# Altium PCB IG-3.PCBDOC (part 3 of 3)
Units mil, origin at the board's own origin, x right, y up, seen from the top; angles counter-clockwise.
Board outline 1917.72 x 964.57 mil, 4 copper layers (Top, GND Plane, Mid1-Ver, Bottom), stack 61.6 mil thick; 39 components, 57 nets, 358 pads, 277 vias.
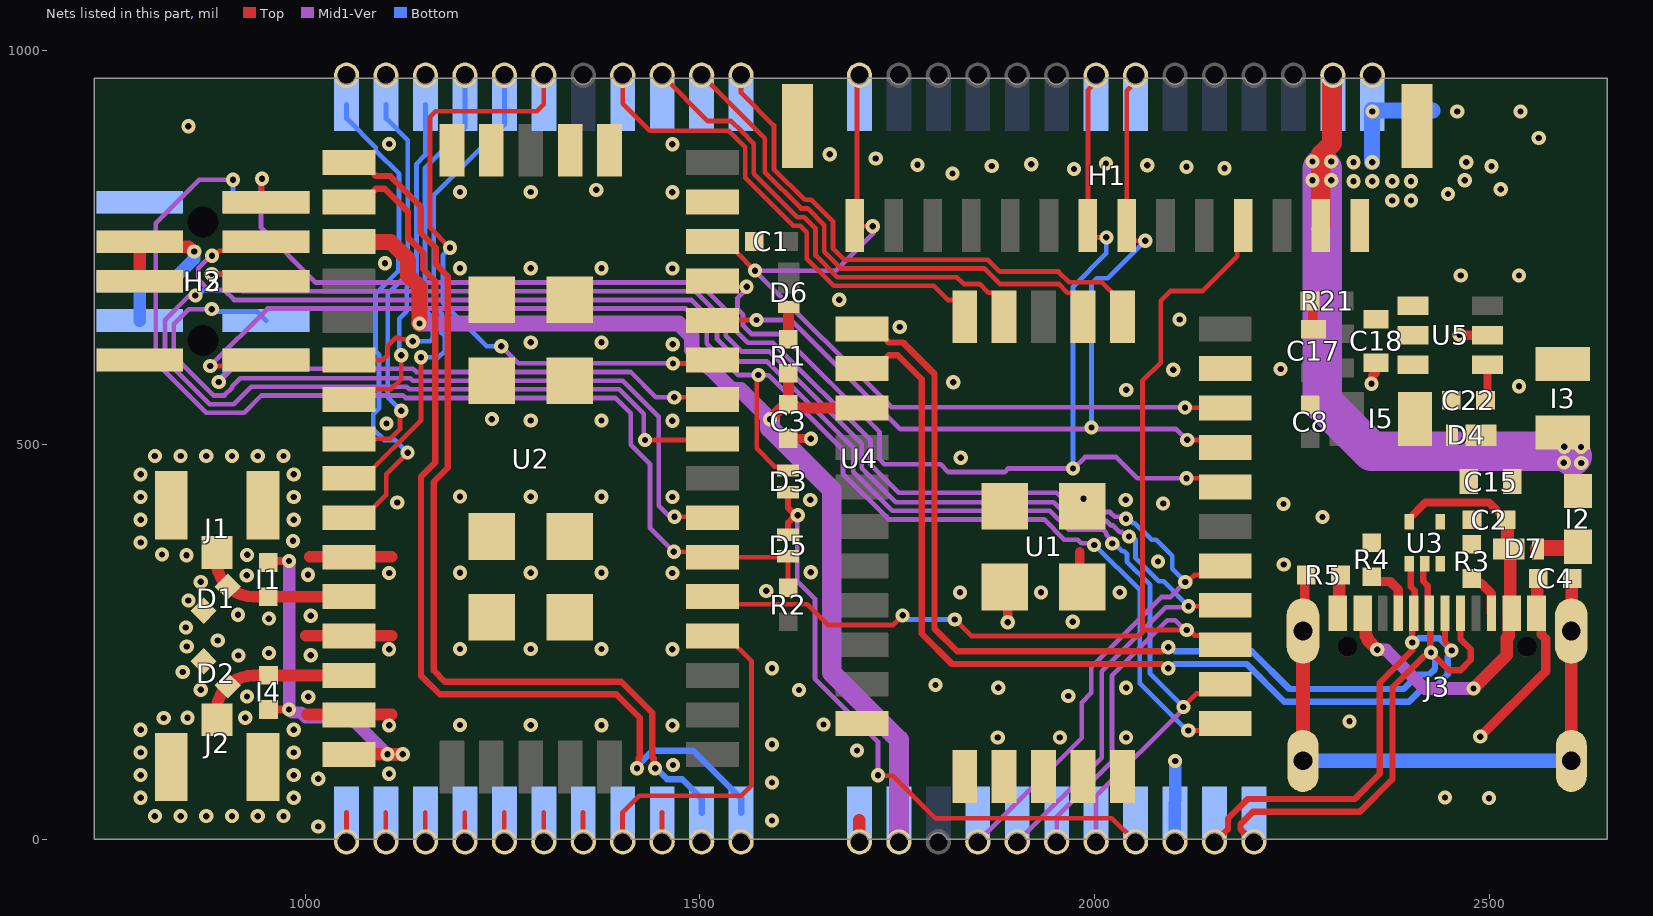
[diagram p4: the nets of this part, all layers, seen from the top]

## Via types
v1: diameter 18, hole 8, Top to Bottom, 277 vias

## Nets (pads, with @x,y where several pads share a name; then routed paths per layer and width w, separated by ;. In a path a pad name is that pad's centre, name@x,y a point inside that pad or via, vN(x,y) a via of type N, cw(c..) or ccw(c..) an arc to the next point about the centre after c; other vN are vias at no path point) (continued)
G11/SWDIO: H2.2 U1.16 U4.18 | length 1998.9
  Top w6: v1(944.88,837.01) 944.88,812.28 H2.2@950.08,807.09 ; v1(2115.07,325.93) 2117.78,325.93 2126.44,334.58 2160.93,334.58 U1.16@2172.68,346.33
  Mid1-Ver w6: v1(944.88,837.01) 943.49,835.62 943.49,775.16 1013.26,705.38 1498.29,705.38 1543.59,660.08 1543.59,646.28 1560.76,629.11 1592.44,629.11 1716.16,505.39 1716.16,474.66 1751.92,438.89 1951.82,438.89 1976.19,414.53 2019.59,414.53 2025.68,408.44 2037.56,408.44 v1(2039.86,406.15) ; U4.18@1852.09,-3.54 1983.78,128.15 1983.78,173.08 1996.03,185.33 1996.03,217.86 2084.88,306.71 2095.85,306.71 v1(2115.07,325.93)
  Bottom w6: v1(2039.86,406.15) 2043.11,406.15 2048.79,400.46 2051.03,400.46 2072.24,379.26 2078.39,379.26 2098.42,359.24 2098.42,342.59 v1(2115.07,325.93)
G12/SWO: H2.6 U1.15 U4.19 | length 1976.4
  Top w6: v1(881.08,716.35) 940.81,716.35 H2.6@950.08,707.09 ; v1(2119.1,295.21) 2171.56,295.21 U1.15@2172.68,296.33
  Mid1-Ver w6: v1(881.08,716.35) 897.43,716.35 919.39,694.38 1493.73,694.38 1532.59,655.52 1532.59,638.06 1552.55,618.11 1587.88,618.11 1665.12,540.87 1705.16,500.83 1705.16,470.1 1748.18,427.08 1948.08,427.08 1971.63,403.53 2015.03,403.53 2021.12,397.44 2023.74,397.44 2032.04,389.15 2034.75,389.15 2040.43,383.46 v1(2043.68,383.46) ; U4.19@1902.09,-3.54 2009.03,103.4 2009.03,212.48 2090.26,293.71 2117.6,293.71 v1(2119.1,295.21)
  Bottom w6: 2052.08,379.95 2052.08,356.07 2081.37,326.79 2087.52,326.79 v1(2119.1,295.21)
G14/SWCLK: H2.4 U1.13 U4.21 | length 1979.5
  Top w6: v1(881.46,739.35) 884.71,739.35 890.94,745.59 938.58,745.59 H2.4@950.08,757.09 ; v1(2112.65,167.51) 2112.65,167.84 2129.39,184.58 2160.93,184.58 U1.13@2172.68,196.33
  Mid1-Ver w6: v1(881.46,739.35) 880.03,739.35 864.08,723.39 864.08,709.31 877.04,696.35 896.57,696.35 909.53,683.38 1489.18,683.38 1521.59,650.97 1521.59,633.5 1549.91,605.19 1585.24,605.19 1694.16,496.28 1694.16,465.54 1743.62,416.08 1943.52,416.08 1967.07,392.53 2010.48,392.53 2014.72,388.29 2014.72,385.67 2022.39,378 v1(2022.39,374.75) ; U4.21@2001.86,-3.54 2001.86,54.01 2112.65,164.8 v1(2112.65,167.51)
  Bottom w6: v1(2022.39,374.75) 2025.64,374.75 2035.43,364.96 2037.57,364.96 2041.08,361.44 2041.08,351.52 2070.33,322.27 2070.33,209.82 v1(2112.65,167.51)
GND: C1.2 C2.2 C3.2 C4.1 C8.2 C15.2 C17.2 C18.2 D1.2 D2.2 D4.A H1.0 H1.1 H2.3 H2.5 H2.9 H3.3 H3.5 H3.9 J1.2 J1.3 J2.2 J2.3 J3.A1_B12 J3.B1_A12 R3.1 R4.1 R5.2 R21.1 U1.0 U1.11 U1.21 U1.23 U1.24 U1.25 U1.26 U1.27 U2.0 U2.11 U2.13 U2.15 U2.31 U3.3 U3.4 U4.1 U4.15 U4.23 U4.37 U4.38 U4.39 U4.40 U4.41 U4.42 U4.43 U4.45 U5.2 | length 1584.9
  Top w6: U4.37@1051.86,6.3 1051.86,33.86 ; U4.38@1101.86,6.3 1101.86,33.86 ; U4.39@1151.86,6.3 1151.86,33.86 ; U4.40@1201.86,6.3 1201.86,33.86 ; U4.41@1251.86,6.3 1251.86,33.86 ; U4.42@1301.86,6.3 1301.86,33.86 ; U4.43@1351.86,6.3 1351.86,33.86 ; U4.45@1451.86,6.3 1451.86,33.86 ; v1@1655.85,144.52 v1(1656.62,145.29)
  Top w11.81: v1(2351.1,577.16) 2352.28,578.34 2352.28,587.31 2356.22,591.25
  Top w12: C3.2@1611.89,507.71 1640.32,507.71 v1(1640.55,507.48) ; U1.0@1886.26,319.57 1889.92,315.89 v1(1889.92,274.85) ; U1.0@1981.02,323.22 1981.02,364.27 ; R21.1@2275.51,681.8 2276.5,680.81 2276.5,647.35 C17.2@2277.48,646.37 ; v1(2462.53,638.96) 2462.76,638.72 2497.72,638.72 U5.2@2497.95,638.49 ; v1(2488.98,129.92) 2571.83,212.77 2571.83,253.95 2566.05,259.73 2566.05,280.61 J3.B1_A12@2560.24,286.42
  Top w14.88: 1000.39,257.78 1109.25,257.78 ; 1001.97,157.78 1109.25,157.78 ; 1005.51,357.78 1109.25,357.78
  Top w16: H2.5@790.08,707.09 H2.3@790.08,757.09 796.58,750.59 851.78,750.59 857.32,745.04 858.7,745.04 v1(859.08,744.65) ; U2.31@1515.8,807.31 U2.31@1523.55,799.56 ; U4.15@1701.86,-3.54 1701.86,24.02 ; J3.A1_B12@2308.27,286.42 2310.04,288.19 2310.04,332.87 R5.2@2311.81,334.65 ; J3.B1_A12@2560.24,286.42 2561.22,287.4 2561.22,329.33 C4.1@2562.2,330.31
  Bottom w16: H3.3@790.08,657.09 H3.5@790.08,707.09 830.58,707.09 858.7,735.2 858.7,744.27 v1(859.08,744.65) ; U4.23@2101.86,-3.54 v1@2102.14,99.62
  Bottom w20: v1(2351.99,857.77) 2351.86,857.9 2351.86,924.21 2352.73,923.34 2428.62,923.34
  other v1: 1016.19,15.96 1591.34,23.62 809.13,29.16 841.73,29.16 874.33,29.16 906.93,29.16 939.53,29.16 972.13,29.16 791.02,52.36 985.21,52.36 2500,51.97 2444.09,52.76 1591.34,71.85 1016.19,76.39 791.02,81.1 985.21,81.1 1106.02,82.95 1465.74,93.93 2102.14,98.93 791.02,109.84 985.21,109.84 1699.04,112.21 1591.34,120.08 1877.38,128.72 1956.12,128.72 2040.03,128.72 791.02,138.58 985.21,138.58 1106.02,144.15 1285.49,144.49 1375.23,144.43 1464.96,144.15 1195.75,144.54 2323.23,149.21 820.47,153.54 850.39,153.94 923.65,153.75 1003.49,180.29 925.98,180.71 1966.61,181.37 867.32,189.37 1625.52,188.99 1877.93,191.82 2040.03,191.83 1798.48,195.36 844.49,211.81 1591.34,216.54 914.96,232.68 1006.69,233.07 953.6,235.83 1106.02,240.66 1195.75,241.06 1285.49,241 1375.23,240.94 1464.96,240.66 849.61,244.09 888.76,251.7 848.43,268.11 1972.44,275.59 953.6,279.44 1006.69,283.07 914.57,284.25 851.57,302.36 1829.51,312.73 1932.15,312.73 2032.06,312.73 1583.86,314.57 867.32,325.98 925.59,334.25 1003.15,335.04 1106.02,337.18 1375.23,337.46 1464.96,337.18 1195.75,337.57 1285.49,337.51 1640.32,338.12 2239.91,347.97 2080.42,351.78 849.21,359.84 926.06,360.24 818.19,360.66 791.02,376.01 984.25,377.95 791.02,404.75 985.21,404.75 2288.98,408.27 2086.99,425.46 2239.55,424.61 1116.27,426.65 1639.76,429.92 2039.72,429.93 1985.98,431.53 791.02,433.49 985.21,433.49 1195.75,434.08 1285.49,434.03 1375.23,433.97 1464.96,433.69 791.02,462.23 985.21,462.23 1830.52,483.25 809.13,485.43 841.73,485.43 874.33,485.43 906.93,485.43 939.53,485.43 972.13,485.43 1102.76,526.77 1375.23,530.48 1464.96,530.2 1285.49,530.54 1236.22,532.28 2040.22,569.33 2537.92,573.94 1820.91,579.08 2099.8,594.89 2235.91,595.74 1465.4,627.15 1285.49,629.54 1375.23,629.54 1753.06,648.99 2107.88,658.55 1676.38,683.46 2464.07,714.32 2537.96,714.32 1464.96,723.23 1195.75,723.62 1285.49,723.57 1375.23,723.51 1100.88,729.85 2377.43,809.47 2401.22,809.47 2448.03,817.72 1195.75,820.13 1285.49,820.08 1464.96,819.74 1368.5,822.83 2514.96,823.62 2328.21,833.87 2351.99,833.87 2377.43,833.87 2401.22,833.87 2469.29,835.04 1820.08,843.7 1974.02,849.21 2164.71,850.21 2116.54,851.97 1869.68,853.15 2503.15,852.76 2066.71,854.11 1775.74,854.54 1919.71,855.41 2014.57,856.3 2328.21,857.77 2471.26,857.87 1722.83,862.6 1664.44,867.98 1106.02,880.94 1464.96,880.65 2562.99,888.58 851.57,903.54 2352.15,922.13 2459.72,922.13 2539.77,922.13
GNSS1_ANT: D1.1 I1.2 J1.1 U2.12 | length 204
  Top w14.88: J1.1@886.76,363.19 886.76,354.55 ccw(c934.01,354.55) 934.01,307.3 U2.12@1055.18,307.3
GNSS1_PPS: H1.14 U1.20 U2.30 U4.14 | length 1140.9
  Top w6: U2.30@1515.8,757.31 1527.55,745.56 1545.27,745.56 1546.27,744.56 1546.27,743.89 v1(1569.68,720.47) ; U4.14@1701.87,966.09 1699.1,963.32 1699.1,780.38 H1.14@1696.33,777.61 1700.24,773.7 1703.31,776.77 v1(1718.9,776.77) ; v1(2114.78,546.84) 2172.17,546.84 U1.20@2172.68,546.33
  Mid1-Ver w6: U4.14@1701.37,967.39 U4.14@1702.09,968.11 ; v1(1718.9,776.77) 1720.35,775.32 1720.35,768.77 1672.05,720.47 v1(1569.68,720.47) 1742.76,547.4 v1@2114.78,547.4
GNSS2_ANT: D2.1 I4.2 J2.1 U2.14 | length 204
  Top w14.88: J2.1@886.76,151.41 886.76,160.06 cw(c934.01,160.06) 934.01,207.3 U2.14@1055.18,207.3
GNSS2_PPS: H1.4 U1.14 U2.21 U4.20 | length 1650.7
  Top w6: U2.21@1515.8,307.31 1525.54,297.57 1635.94,297.57 1662.01,271.49 1744.72,271.49 v1(1756.81,283.58) ; v1(1822.83,278.35) 1843.7,257.48 2056.55,257.48 2060.68,261.61 2060.68,580.74 2083.86,603.92 2083.86,682.38 2096.05,694.57 2136.77,694.57 2181.01,738.81 2181.01,770.16 H1.4@2188.46,777.61 ; 2061.68,265.12 2119.7,265.12 2126.74,258.08 2154.04,258.08 U1.14@2165.79,246.34
  Mid1-Ver w6: U4.20@1952.09,-3.54 1952.09,28.07 2022.03,98.02 2022.03,207.09 2092.34,277.39 2102.02,277.39 2114.29,265.12 v1(2116.99,265.12)
  Bottom w6: v1(1756.81,283.58) 1762.04,278.35 v1(1822.83,278.35)
GPX_G5/SCLK: U2.9 U4.32 | length 627.5
  Top w6: U2.9@1055.18,457.31 1072.89,457.31 1146.46,530.87 v1(1146.46,610.63)
  Bottom w6: v1(1146.46,610.63) 1168.49,610.63 1176.84,618.98 1176.84,637.21 1172.49,641.56 1172.49,666.13 1162.55,676.07 1162.55,816.13 1252.09,905.66 U4.32@1252.09,931.1 U4.32@1252.09,954.72 U4.32@1252.09,968.11
GPX_G6/Rx1/MOSI: U2.6 U4.33 | length 472.7
  Top w6: U2.6@1055.18,607.3 1097.64,607.3 1104.26,613.92 1104.26,625.15 1114.22,635.11 1119.19,635.11 1120.9,633.4 1133.53,633.4 v1(1135.83,631.1)
  Bottom w6: v1(1135.83,631.1) 1157.97,631.1 1161.49,634.62 1161.49,660.58 1151.55,670.52 1151.55,850.96 1202.09,901.49 U4.33@1202.09,931.1 U4.33@1202.09,954.72
GPX_G7/Tx1/MISO: U2.7 U4.34 | length 439.6
  Top w6: U2.7@1055.18,557.3 1067.92,570.05 1108.32,570.05 1121.26,583 v1(1121.26,613.3)
  Bottom w6: v1(1121.26,613.3) 1118.96,615.6 1118.96,623.92 1118.83,624.06 1118.83,659.58 1128.32,669.07 1128.32,699.46 1140.55,711.69 1140.55,855.51 1152.09,867.05 U4.34@1152.09,931.1
GPX_G8/C\S\: U2.8 U4.35 | length 510.6
  Top w6: U2.8@1055.18,507.3 1107.34,507.3 1119.76,519.73 1119.76,541.45 v1(1121.26,542.95)
  Bottom w6: U4.35@1102.09,931.1 1102.09,913.39 1129.55,885.92 1129.55,716.24 1104.26,690.95 1104.26,559.95 v1(1121.26,542.95)
GPX_G9/S\P\I\_\E\N\: U2.10 U4.36 | length 636
  Top w6: U2.10@1055.18,407.31 1072.89,407.31 1102.25,436.66 1102.25,462.62 v1(1129.46,489.83)
  Bottom w6: U4.36@1052.09,931.1 1052.09,913.39 1089.02,876.45 1089.02,872.7 1118.55,843.17 1118.55,752.78 1117.88,752.11 1117.88,720.13 1088.77,691.02 1088.77,618.32 1093.26,613.82 1093.26,546.18 1085.76,538.67 1085.76,519.73 1099.56,505.93 1113.36,505.93 v1(1129.46,489.83)
GPX_G10/BOOT: U2.27 U4.31 | length 812.5
  Top w6: v1(1183.07,749.61) 1157.95,774.73 1157.95,915.21 1165.13,922.4 1293.38,922.4 1302.09,931.1 U4.31@1302.09,968.11 ; v1(1465.75,602.76) 1511.26,602.76 U2.27@1515.8,607.31
  Mid1-Ver w6: v1(1248.03,624.65) 1269.68,603.01 1465.5,603.01 v1(1465.75,602.76)
  Bottom w6: v1(1183.07,749.61) 1183.07,748.96 1174.2,740.09 1174.2,679.98 1229.53,624.65 v1(1248.03,624.65)
GPX_G11/SWDIO: H3.2 U2.26 | length 725
  Top w6: v1(1467.32,559.84) 1513.27,559.84 U2.26@1515.8,557.31
  Mid1-Ver w6: v1(890.19,579.27) 906.96,596.05 1136.19,596.05 1137.35,594.88 1137.64,594.88 1140.52,592.01 1412.04,592.01 1444.2,559.84 v1(1467.32,559.84)
  Bottom w6: v1(890.19,579.27) 890.19,582.51 898.08,590.41 898.08,595.59 909.58,607.09 H3.2@950.08,607.09
GPX_G12/SWO: H3.6 U2.25 | length 971.8
  Top w6: v1(1430.32,505.91) 1514.41,505.91 U2.25@1515.8,507.31
  Mid1-Ver w6: v1(860.45,688.9) 859.25,687.7 851.48,687.7 822.07,658.29 822.07,607.78 878.59,551.27 909.02,551.27 930.98,573.23 1128.18,573.23 1131.4,570.01 1397.62,570.01 1428.76,538.86 1428.76,507.46 v1(1430.32,505.91)
  Bottom w6: v1(860.45,688.9) 863.7,688.9 870.39,695.59 938.58,695.59 H3.6@950.08,707.09
GPX_G16/QDEC0.A: U2.38
GPX_G17/QDEC0.B: U2.39
GPX_G18/QDEC1.A: U2.41
GPX_G19/QDEC1.B: U2.42
GPX_G20/LNA-EN: U2.20 U4.44 | length 425.4
  Top w6: U4.44@1401.86,6.3 1401.86,33.86 1423.11,55.1 1552.49,55.1 1565.35,67.96 1565.35,225.47 1533.52,257.31 U2.20@1515.8,257.31
GPX_nRESET: D5.A H3.10 R2.2 U2.22 | length 1393.8
  Top w6: v1(1466.93,364.17) 1508.94,364.17 U2.22@1515.8,357.31 1604.76,357.31 1605.73,358.27 D5.A@1611.63,358.27 1611.63,319.03 R2.2@1611.88,318.79
  Mid1-Ver w6: v1(908.14,835.59) 865.11,835.59 810.07,780.54 810.07,604.23 874.03,540.27 922.22,540.27 944.18,562.23 1123.62,562.23 1126.85,559.01 1393.06,559.01 1412.38,539.69 1412.38,499.8 1436.61,475.56 1436.61,394.49 v1(1466.93,364.17)
  Bottom w6: v1(908.14,835.59) 908.14,818.59 919.64,807.09 H3.10@950.08,807.09
GPX_Rx: H1.7 U1.19 U2.28 U4.7 | length 1233.4
  Top w6: U2.28@1515.8,657.31 1516.37,657.87 v1(1571.59,657.87) ; U4.7@2051.87,966.09 2051.87,959.6 2040.82,948.55 2040.82,758.27 v1(2064.22,758.27) ; v1(2117.42,505.96) 2163.05,505.96 U1.19@2172.68,496.33
  Mid1-Ver w6: v1(1571.59,657.87) 1615.73,657.87 1753.88,519.72 1994.26,519.72 v1(1996.13,521.6) ; v1@1996.13,519.72 2103.65,519.72 v1(2117.42,505.96)
  Bottom w6: v1(1996.13,521.6) 1996.13,703.77 2003.13,710.76 2016.72,710.76 v1(2064.22,758.27)
GPX_SWCLK: H3.4 U2.23 | length 1024.4
  Top w6: v1(1467.72,408.66) 1514.45,408.66 U2.23@1515.8,407.31
  Mid1-Ver w6: v1(881.08,671.69) 852,671.69 833.07,652.76 833.07,612.34 883.14,562.27 897.23,562.27 907.29,572.33 907.29,574.17 917.35,584.23 1132.74,584.23 1135.96,581.01 1402.17,581.01 1447.61,535.57 1447.61,422.7 1459.74,410.57 1465.8,410.57 v1(1467.72,408.66)
  Bottom w6: v1(881.08,671.69) 884.33,671.69 887.43,668.59 938.58,668.59 H3.4@950.08,657.09
GPX_Tx: H1.8 U1.18 U2.29 U4.8 | length 1380.8
  Top w6: U2.29@1515.8,707.31 1523.06,700.05 v1(1559.11,700.05) ; v1@1971.13,471.4 v1(1972.78,469.75) ; U4.8@2001.87,966.09 2001.87,959.6 1991.61,949.34 1991.61,771.41 2000.42,762.6 v1(2015.01,762.6) ; v1(2116.7,457.32) 2161.68,457.32 U1.18@2172.68,446.33
  Mid1-Ver w6: v1(1559.11,700.05) 1559.11,697.62 1547.59,686.11 1547.59,671.64 1554.59,664.64 1554.59,650.83 1565.32,640.11 1603.84,640.11 1727.5,516.44 1727.5,481.45 1733.79,475.17 1804.92,475.17 1814.84,465.25 1885.97,465.25 1890.47,469.75 1973.67,469.75 1988.08,484.16 2027.48,484.16 2054.32,457.32 v1(2116.7,457.32)
  Bottom w6: v1(1972.78,469.75) 1972.78,699.99 2015.01,742.22 v1(2015.01,762.6)
GUSB.D_N: U2.2 U4.47 | length 1254
  Top w8: U2.2@1055.18,807.31 1072.89,807.31 1084.64,819.05 1084.64,819.62 1089.33,824.3 1100.64,824.3 1129.95,794.99 1129.95,761.94 1149.07,742.82 1149.07,722.22 1164.46,706.84 1164.46,477.31 1146.46,459.31 1146.46,207.15 1170,183.61 1393.7,183.61 1423.62,153.69 1423.62,103.94 1422.04,102.35 1422.04,91.68 v1(1420.12,89.76)
  Bottom w8: v1(1420.12,89.76) 1420.12,92.22 1439.83,111.93 1491.34,111.93 1552.09,51.18 U4.47@1552.09,33.46
GUSB.D_P: U2.1 U4.46 | length 1187.7
  Top w8: U2.1@1055.18,857.3 1072.89,857.3 1084.64,845.56 1084.64,844.99 1089.33,840.3 1107.27,840.3 1145.95,801.62 1145.95,768.57 1165.07,749.45 1165.07,728.85 1180.46,713.46 1180.46,470.68 1162.46,452.68 1162.46,213.78 1176.63,199.61 1400.33,199.61 1439.62,160.31 1439.62,103.94 1441.21,102.35 1441.21,91.68 v1(1443.12,89.76)
  Bottom w8: v1(1443.12,89.76) 1444.45,89.76 1458.29,75.93 1477.34,75.93 1502.09,51.18 U4.46@1502.09,33.46
IMX_G16/QDEC0.A: U1.28 U4.26 | length 685.7
  Top w6: U4.26@1552.09,968.11 1552.09,945.87 1593.66,904.3 1593.66,849.28 1632.65,810.29 1641,810.29 1668.43,782.86 1668.43,748.92 1683.1,734.25 1864.98,734.25 1879.94,719.29 1954.35,719.29 1967.72,705.92 2009.35,705.92 2035.47,679.8 U1.28@2035.47,662.09
IMX_G17/QDEC0.B: U1.29 U4.27 | length 665.5
  Top w6: U4.27@1502.09,968.11 1582.01,888.19 1582.01,845.38 1628.09,799.29 1636.44,799.29 1657.43,778.3 1657.43,744.36 1678.54,723.25 1860.43,723.25 1880.13,703.55 1954.53,703.55 1965.53,692.55 1972.72,692.55 1985.47,679.8 U1.29@1985.47,662.09
IMX_G18/QDEC1.A: U1.31 U4.28 | length 612.6
  Top w6: U4.28@1452.09,968.11 1510.1,910.1 1539.64,910.1 1552.71,897.03 1568.27,881.47 1568.27,843.56 1623.54,788.29 1631.89,788.29 1646.43,773.74 1646.43,739.8 1673.99,712.25 1825.53,712.25 1834.23,703.55 1854.53,703.55 1865.53,692.55 1872.72,692.55 1885.47,679.8 U1.31@1885.47,662.09
IMX_G19/QDEC1.B: U1.32 U4.29 | length 629
  Top w6: U4.29@1402.09,968.11 1402.09,931.91 1436.34,897.65 1536.53,897.65 1557.27,876.91 1557.27,838.01 1617.98,777.29 1627.33,777.29 1635.43,769.19 1635.43,735.25 1669.43,701.25 1796.31,701.25 1814.24,683.32 1822.72,683.32 1835.47,670.57 U1.32@1835.47,662.09
IMX_nRESET: D3.A H2.10 U1.12 | length 1856.4
  Top w6: v1(879.22,599.69) 942.68,599.69 H2.10@950.08,607.09 ; v1(1574.02,588.19) 1571.77,585.94 1571.77,495.24 1595.01,472.01 1606.76,472.01 D3.A@1611.63,467.14 ; v1(2118.89,137.72) 2155,137.72 U1.12@2163.61,146.33
  Mid1-Ver w6: v1(879.22,599.69) 951.92,672.38 1481.79,672.38 1508.59,645.58 1508.59,628.12 1548.52,588.19 v1(1574.02,588.19) 1574.45,587.76 1587.05,587.76 1681.16,493.65 1681.16,462.99 1739.06,405.08 1936.14,405.08 1961.69,379.53 1978.49,379.53 1983.07,374.94 1997.19,374.94 v1(1999.49,372.65)
  Bottom w6: v1(1999.49,372.65) 2000.45,372.65 2057.33,315.76 2057.33,197.36 2116.98,137.72 v1(2118.89,137.72)
NetC22_1: C22.1 U5.1 | length 48.3
  Top w10: C22.1@2490.67,555.99 2490.91,555.99 2497.95,563.03 U5.1@2497.95,601.09
NetD6_C: D6.C R1.1 | length 41
  Top w14: R1.1@1611.89,633.69 1612.2,634 1612.2,674.1 D6.C@1612.51,674.41
NetD7_C: D7.C I2.2 | length 51.7
  Top w20: D7.C@2562.01,367.72 2563.39,369.09 2611.22,369.09 I2.2@2612.6,370.47
NetJ3_A5: J3.A5 R4.2 | length 69.9
  Top w12: R4.2@2351.57,332.28 2357.39,326.47 2374.67,326.47 2384.94,316.2 2384.94,286.51 J3.A5@2385.04,286.42
NetJ3_B5: J3.B5 R3.2 | length 57.7
  Top w12: R3.2@2477.95,330.32 2483.76,324.5 2489.48,324.5 2503.06,310.93 2503.06,286.51 J3.B5@2503.15,286.42
nRESET: D3.C D5.C U4.22 | length 801.2
  Top w6: v1(1725.59,80.9) 1726.17,80.31 1744.49,80.31 1798.25,26.55 2021.99,26.55 U4.22@2052.09,-3.54
  Top w8: D5.C@1611.63,385.83 1611.63,401.06 1619.02,408.45 1621.97,408.45 v1(1623.88,410.37) 1621.97,412.28 1619.06,412.28 1611.63,419.71 D3.C@1611.63,439.58
  Mid1-Ver w6: v1@1623.32,410.94 1623.32,326.68 1645.67,304.33 1645.67,203.29 1725.59,123.37 v1(1725.59,80.9)
SHELL_USB: C4.2 J3.S1 J3.S2 J3.S3 J3.S4 R5.1 | length 809
  Top w12: J3.S1@2264.17,263.78 2266.34,265.94 2266.34,332.48 R5.1@2268.5,334.65
  Top w16: J3.S3@2604.33,99.21 J3.S4@2604.33,263.78 2604.92,264.37 2604.92,329.72 C4.2@2605.51,330.31
  Top w18: J3.S2@2264.17,99.21 J3.S1@2264.17,263.78
  Bottom w18: J3.S2@2264.17,99.21 J3.S3@2604.33,99.21
SW: C22.2 D4.C I5.1 U5.6
USB.D_N: J3.A7 J3.B7 U1.2 U3.1 U4.24 | length 1812.9
  Top w8: U1.2@1705.16,596.34 1722.87,596.34 1734.62,608.09 1734.62,608.65 1739.31,613.34 1750.62,613.34 1781.18,582.78 1781.18,260.09 1819.36,221.91 2085.44,221.91 2090.8,216.55 v1(2093.51,216.55) ; U4.24@2152.09,-3.54 2153.12,-3.54 2169.09,12.43 2169.09,25.68 2194.25,50.84 2329.79,50.84 2361.59,82.64 2361.59,198.28 2402.82,239.51 v1(2402.82,249.26) 2402.82,280.83 2406.57,284.57 J3.B7@2404.72,286.42 2405.9,287.59 2405.9,314.76 2400.66,319.99 2400.66,347.17 U3.1@2398.82,349.02 ; J3.A7@2444.09,286.42 2444.09,250.33 2452.63,241.8 v1(2452.63,239.09)
  Bottom w8: 2101.57,221.91 2192.86,221.91 2240.52,174.25 2398.6,174.25 2416.94,192.59 2431.11,192.59 2447.5,208.99 2447.5,231.26 2452.63,236.39 v1(2452.63,239.09) 2437.11,254.61 2410.88,254.61 2405.52,249.26 v1(2402.82,249.26)
USB.D_P: J3.A6 J3.B6 U1.1 U3.2 U4.25 | length 1797.9
  Top w8: U1.1@1705.16,646.34 1722.87,646.34 1734.62,634.59 1734.62,634.02 1739.31,629.34 1757.25,629.34 1797.18,589.4 1797.18,266.71 1825.98,237.91 2085.44,237.91 2090.8,243.27 v1(2093.51,243.27) ; U4.25@2202.09,-3.54 2201.06,-3.54 2185.09,12.43 2185.09,19.05 2200.87,34.84 2336.42,34.84 2377.59,76.02 2377.59,191.65 2417.62,231.68 ; U3.2@2418.5,349.02 2416.66,347.17 2416.66,326.62 2422.5,320.78 2422.5,288.32 J3.A6@2424.41,286.42 2425.39,285.43 2425.39,237.6 v1(2426.38,236.61) 2448.82,214.17 2463.78,214.17 2476.77,227.17 2476.77,240.41 2463.78,253.4 J3.B6@2463.78,286.42
  Bottom w8: 2101.57,237.91 2199.49,237.91 2247.15,190.25 2391.97,190.25 2410.31,208.59 2424.48,208.59 2431.5,215.61 2431.5,228.78 2426.38,233.91 v1(2426.38,236.61)
VANT: I1.1 I4.1 U2.16 | length 477
  Top w10: I1.1@952.91,350.64 952.91,352.36 v1(979.16,352.36) ; I4.1@953.1,164.19 v1@978.35,164.17
  Top w15.75: U2.16@1055.18,107.48 v1(1103.94,107.48) v1(1123.23,107.48)
  Mid1-Ver w15.75: v1(979.16,352.36) v1(979.16,164.18) 979.77,164.18 983.49,160.46 994.27,160.46 1000.51,154.22 1057.2,154.22 v1(1103.94,107.48) v1(1123.23,107.48)
VBAT: C3.1 R1.2 U1.3 U2.3 U4.16 | length 1418.2
  Top w14: v1(1588.77,532) C3.1@1602.91,546.14 ; C3.1@1611.89,546.14 U1.3@1691.57,546.14 ; C3.1@1611.89,551.02 R1.2@1611.89,590.39
  Top w20: U2.3@1055.18,757.31 1055.64,756.84 1108.19,756.84 1130.07,734.95 1130.07,714.35 1144.49,699.94 v1(1144.49,653.54)
  Mid1-Ver w20: v1(1144.49,653.54) 1472.94,653.54 1489.59,636.89 1489.59,620.25 1540.65,569.19 1551.59,569.19 v1(1588.77,532)
  Mid1-Ver w25: v1(1588.77,532) 1588.77,520.88 1666.82,442.84 1666.82,211.14 1752.09,125.87 U4.16@1752.09,-3.54
VBUS: C2.1 D7.A J3.A4_B9 J3.B4_A9 U3.5 | length 577.4
  Top w10: U3.5@2398.82,402.17 2398.82,406.1 2419.25,426.54 2499.84,426.54 C2.1@2521.65,404.72
  Top w16: J3.A4_B9@2339.76,286.42 2343.57,282.61 2343.57,257.47 2346.27,254.78 2346.27,252.16 v1(2358.27,240.16) ; v1(2480.32,190.94) 2522.24,232.87 2522.24,254.78 2524.93,257.47 2524.93,282.61 J3.B4_A9@2528.74,286.42 2526.93,288.23 2526.93,365.91 D7.A@2525.12,367.72 2523.39,369.45 2523.39,402.99 C2.1@2521.65,404.72
  Mid1-Ver w16: v1(2358.27,240.16) 2358.65,239.77 2369.49,239.77 2418.32,190.94 v1(2480.32,190.94)
VIN: C15.1 H1.2 I2.1 I3.1 U4.2 | length 835.3
  Top w25: H1.2@2286.88,777.61 2286.88,867.85 2300.88,881.84 2300.88,965.1 U4.2@2301.87,966.09
  Mid1-Ver w50: 2288.91,849.61 2288.91,553.94 2351.1,491.76 2599.19,491.76 2605.51,485.43
  other v1: 2594.88,477.17 2616.93,476.77 2595.28,497.24 2616.54,496.85 2276.35,834.99 2300.14,834.99 2276.35,858.89 2300.14,858.89
VIN_P: C18.1 I3.2 U5.4 U5.5
pads on no net: H2.7 H2.8 H2.11 H2.12 H3.7 H3.8 H3.11 H3.12 J3. J3.A8 J3.B8 U2.4 U2.5 U2.17 U2.18 U2.19 U2.24 U2.33 U2.34 U2.35 U2.36 U2.37 U4.4

## Polygon pours and split planes (outlines as drawn)
GND on Top "GND_L01_P014" (solid, remove dead copper, pour order 14): 754.72,20.35 754.72,944.88 2635.04,944.88 2635.04,20.35
GND on Top "RF_GND_L-01_P-001" (solid, pour order 12): 754.72,507.87 1030.03,507.87 1030.03,20.08 754.72,20.08
+3.3V on Mid1-Ver "+3.3V_L03_P010" (solid, remove dead copper, pour order 10): 753.94,9.84 753.94,954.72 2635.04,954.72 2635.04,9.84
GND on Mid1-Ver "RF_GND_L-03_P-001" (solid, pour order 9): 746.06,507.87 1030.03,507.87 1030.03,12.99 746.06,12.99
GND on Bottom "GND_L04_P013" (solid, remove dead copper, pour order 13): 754.72,20.35 754.72,944.88 2635.04,944.88 2635.04,20.35
GND on GND Plane (split plane): 616 vertices, not listed, extent 742.37,10.09 2639.91,954.48

## Other copper
Top:
  region net VIN_P: 2558.02,737.74 2558.02,580.31 2625,580.31 2625,775 2370,775 2370,730 2340,730 2340,650 2370,650 2370,625 2443.15,625 2443.15,737.74
  region net SW: 2361.75,497.83 2456.55,497.83 2456.55,612.99 2387.34,612.99 2387.34,566.73 2361.75,566.73
  region net VIN: 2627.92,419.68 2627.92,537.01 2557.95,537.01 2517.9,475 2517.9,437.59 2594.88,437.59 2594.88,419.68
Mid1-Ver:
  region net +3.3V: 2234.62,734.78 2234.62,671.93 2224.77,662.08 2169.31,662.08 2157.79,673.6 2218.98,734.78
Bottom:
  region net +3.3V: 2234.62,734.78 2234.62,671.93 2224.77,662.08 2169.31,662.08 2157.79,673.6 2218.98,734.78

## Silkscreen, mask and mechanical layers (free items; w line width, h text height)
Silkscreen Top:
  region: 2035.16,390.13 cw(c1938.55,390.13) 2035.16,390.27 cw(c2030.93,390.26) 2035.16,390.26 cw(c2030.93,390.26) 2026.71,390.26 ccw(c1938.55,390.13) 2026.71,390.13 cw(c2030.93,390.13)
  region: 1934.4,344.71 1934.4,325.1 1942.81,325.1 1942.81,346
  region: 1938.75,458.22 1926.23,437.03 1934.45,433.41 1934.45,426.06 1942.79,427.07 1942.79,433.43 1950.83,436.85
  region: 1987.08,420.74 1965.89,433.27 1962.27,425.04 1961.29,425.04 1962.29,416.7 1965.71,408.67
  region: 1961.34,425.02 1952.66,424.73 1941.39,423.71 1935.91,422.97 1926.56,421.18 1921.44,419.86 1914.97,417.63 1910.78,415.48 1908.57,414.08 1907.02,412.85 1905.35,411.25 1904.27,409.65 1903.38,408.22 1902.85,406.8 1902.51,405.36 1902.39,403.99 1902.39,402.39 1902.57,401.26 1903.16,399.44 1903.86,397.86 1904.94,396.39 1906.74,394.48 1908.44,393.06 1910.46,391.66 1913.57,390.03 1917.02,388.43 1921.03,386.88 1924.96,385.57 1928.65,384.42 1932.26,383.43 1932.26,392.2 1926.76,393.76 1921.57,395.56 1917.27,397.4 1913.94,399.18 1912.63,400.24 1911.37,401.62 1910.92,402.54 1910.74,403.43 1910.74,404.41 1911.25,405.39 1912.18,406.42 1913.41,407.41 1914.74,408.25 1916.5,409.15 1918.55,410.03 1920.29,410.64 1922.21,411.32 1924.73,411.99 1927.62,412.8 1931.74,413.68 1936.07,414.45 1940.26,415.06 1946.03,415.71 1953.11,416.41 1962.26,416.92
  region: 1934.4,410.84 1934.4,359.9 1942.81,361.18 1942.81,412.13
  region: 1909.85,346.75 1922.19,347.09 1932.95,347.98 1941.28,349.1 1950.63,350.9 1955.75,352.21 1962.22,354.44 1966.41,356.59 1968.62,358 1970.17,359.22 1971.84,360.82 1972.92,362.42 1973.81,363.86 1974.34,365.28 1974.68,366.71 1974.8,368.08 1974.8,369.68 1974.62,370.81 1974.03,372.63 1973.33,374.21 1972.25,375.68 1970.45,377.59 1968.75,379.01 1966.73,380.41 1963.62,382.05 1960.17,383.65 1956.16,385.19 1952.23,386.5 1948.54,387.65 1944.93,388.64 1944.93,379.87 1950.43,378.31 1955.63,376.51 1959.92,374.68 1963.25,372.9 1964.56,371.84 1965.82,370.45 1966.27,369.54 1966.45,368.64 1966.45,367.67 1965.94,366.68 1965.01,365.65 1963.79,364.67 1962.46,363.82 1960.69,362.92 1958.65,362.04 1956.9,361.43 1954.98,360.75 1952.46,360.08 1949.57,359.27 1945.45,358.39 1941.12,357.62 1936.93,357.01 1931.16,356.36 1924.08,355.66 1909.85,355
  text "IG-3.0.0_G" at 2638.98,630.31 h65 r90
  text "1" at 739.68,380.18 h98.43
  text "2" at 739.68,48.32 h98.43
Silkscreen Bottom:
  text "'.PcbRevision'" at 2367.89,230.86 h80
Dimensions:
  drawing of 295 lines, arcs and shapes, not listed
  text "Layer" at 3112.02,1385.56 h60
  text "Name" at 3521.93,1385.56 h60
  text "Material" at 4691.6,1385.56 h60
  text "Thickness" at 5551.37,1385.56 h60
  text "Constant" at 6201.2,1385.56 h60
  text "Board Layer Stack" at 6771.06,1385.56 h60
  text "Silkscreen Top" at 3521.93,1265.56 h60
  text "Solder Mask Top" at 3521.93,1145.56 h60
  text "Solder Resist" at 4691.6,1145.56 h60
  text "0.40mil" at 5551.37,1145.56 h60
  text "3.5" at 6201.2,1145.56 h60
  text "1" at 3112.02,1025.56 h60
  text "Top" at 3521.93,1025.56 h60
  text "2.10mil" at 5551.37,1025.56 h60
  text "Dielectric1" at 3521.93,905.56 h60
  text "PP-006" at 4691.6,905.56 h60
  text "8.00mil" at 5551.37,905.56 h60
  text "4.1" at 6201.2,905.56 h60
  text "2" at 3112.02,785.56 h60
  text "GND Plane" at 3521.93,785.56 h60
  text "0.70mil" at 5551.37,785.56 h60
  text "Dielectric3" at 3521.93,665.56 h60
  text "Core-009" at 4691.6,665.56 h60
  text "40.00mil" at 5551.37,665.56 h60
  text "4.5" at 6201.2,665.56 h60
  text "3" at 3112.02,545.56 h60
  text "Mid1-Ver" at 3521.93,545.56 h60
  text "0.70mil" at 5551.37,545.56 h60
  text "Dielectric2" at 3521.93,425.56 h60
  text "PP-006" at 4691.6,425.56 h60
  text "8.00mil" at 5551.37,425.56 h60
  text "4.1" at 6201.2,425.56 h60
  text "4" at 3112.02,305.56 h60
  text "Bottom" at 3521.93,305.56 h60
  text "2.10mil" at 5551.37,305.56 h60
  text "Solder Mask Bottom" at 3521.93,185.56 h60
  text "Solder Resist" at 4691.6,185.56 h60
  text "0.40mil" at 5551.37,185.56 h60
  text "3.5" at 6201.2,185.56 h60
  text "Silkscreen Bottom" at 3521.93,65.56 h60
Drill Drawing:
  lines w5: 722.68,-760.1 2972.08,-760.1 ; 722.68,-235.1 2972.08,-235.1 ; 1041.35,-847.6 1041.35,-147.6 ; 1445.75,-847.6 1445.75,-147.6 ; 2228.01,-847.6 2228.01,-147.6 ; 2520.44,-847.6 2520.44,-147.6 ; 722.68,-847.6 2972.08,-847.6 2972.08,-147.6 722.68,-147.6 722.68,-847.6 ; 757.29,-733.85 796.18,-733.85 796.18,-694.97 757.29,-694.97 757.29,-733.85 ; 757.29,-636.63 767.02,-636.63 776.74,-646.35 786.46,-636.63 796.18,-636.63 786.46,-626.91 796.18,-617.19 786.46,-617.19 776.74,-607.47 767.02,-617.19 757.29,-617.19 767.02,-626.91 757.29,-636.63 ; 757.29,-558.85 776.74,-549.13 796.18,-558.85 786.46,-539.41 796.18,-519.97 776.74,-529.69 757.29,-519.97 767.02,-539.41 757.29,-558.85 ; 757.29,-451.91 776.74,-471.35 796.18,-451.91 776.74,-432.47 757.29,-451.91 ; 757.29,-383.85 757.29,-374.13 767.02,-364.41 757.29,-354.69 757.29,-344.97 767.02,-344.97 776.74,-354.69 786.46,-344.97 796.18,-344.97 796.18,-354.69 786.46,-364.41 796.18,-374.13 796.18,-383.85 786.46,-383.85 776.74,-374.13 767.02,-383.85 757.29,-383.85 ; 757.29,-286.63 767.02,-286.63 767.02,-296.35 786.46,-296.35 786.46,-286.63 796.18,-286.63 796.18,-267.19 786.46,-267.19 786.46,-257.47 767.02,-257.47 767.02,-267.19 757.29,-267.19 757.29,-286.63
  text "Symbol" at 775.18,-208.85 h42
  text "Hit Count" at 1067.6,-208.85 h42
  text "Finished Hole Size" at 1472,-208.85 h42
  text "Plated" at 2254.26,-208.85 h42
  text "Hole Type" at 2546.69,-208.85 h42
  text "2" at 1067.6,-296.35 h35
  text "23.62mil (0.600mm)" at 1472,-296.35 h35
  text "PTH" at 2254.26,-296.35 h35
  text "Slot" at 2546.69,-296.35 h35
  text "2" at 1067.6,-383.85 h35
  text "23.62mil (0.600mm)" at 1472,-383.85 h35
  text "PTH" at 2254.26,-383.85 h35
  text "Slot" at 2546.69,-383.85 h35
  text "2" at 1067.6,-471.35 h35
  text "25.59mil (0.650mm)" at 1472,-471.35 h35
  text "NPTH" at 2254.26,-471.35 h35
  text "Round" at 2546.69,-471.35 h35
  text "2" at 1067.6,-558.85 h35
  text "38.98mil (0.990mm)" at 1472,-558.85 h35
  text "NPTH" at 2254.26,-558.85 h35
  text "Round" at 2546.69,-558.85 h35
  text "47" at 1067.6,-646.35 h35
  text "23.00mil (0.584mm)" at 1472,-646.35 h35
  text "PTH" at 2254.26,-646.35 h35
  text "Round" at 2546.69,-646.35 h35
  text "275" at 1067.6,-733.85 h35
  text "8.00mil (0.203mm)" at 1472,-733.85 h35
  text "PTH" at 2254.26,-733.85 h35
  text "Round" at 2546.69,-733.85 h35
  text "330 Total" at 1067.6,-821.35 h35
  text "Slot definitions :" at 775.18,-904.26 h35
  text "Routed Path Length" at 1375.25,-904.26 h35
  text "= Calculated from tool start centre position to tool end centre position." at 2016.13,-904.26 h35
  text "Hole Length" at 1375.25,-960.91 h35
  text "= Routed Path Length + Tool Size = Slot length as defined in the PCB layout" at 1777.05,-960.91 h35
Board Outline:
  the board outline again, w5

## Dimensions
2650,0 to 2362.8,964.57 on Dimensions
1040.92,0 to 2650,0 on Dimensions

## Text inside footprints (layer, text, board x,y; h text height)
J3: Layer_15 "PCB EDGE" at 2646.85,0.79 h16
U1: Silkscreen Top "22" at 2085,634.53 h40; Silkscreen Top "12" at 2086.06,134.53 h40; Silkscreen Top "11" at 1747.4,134.53 h40; Silkscreen Top "1" at 1747.4,634.53 h40
U2: Silkscreen Top "1" at 1099.43,843.8 h40; Silkscreen Top "16" at 1099.43,93.8 h40; Silkscreen Top "17" at 1434.43,93.8 h40; Silkscreen Top "32" at 1434.43,843.8 h40
U4: Silkscreen Bottom "36" at 1065.2,885.83 h45 r90; Silkscreen Bottom "26" at 1565.2,885.83 h45 r90; Silkscreen Bottom "47" at 1538.98,78.74 h45 r270; Silkscreen Bottom "37" at 1038.98,78.74 h45 r270; Silkscreen Bottom "C" at 2356.88,176.96 h30; Silkscreen Bottom "2026" at 2321,171.18 h50; Silkscreen Bottom "SENSE" at 1130.65,235.87 h80; Silkscreen Bottom "INERTIAL" at 1462.85,235.94 h80; Silkscreen Bottom "IS-IG-3.0.0_G" at 2358.66,712.37 h150; Silkscreen Bottom "1" at 2338.58,866.14 h45 r270; Silkscreen Bottom "14" at 1688.98,846.46 h45 r270; Silkscreen Bottom "25" at 2188.98,78.74 h45 r270; Silkscreen Bottom "15" at 1688.98,78.74 h45 r270